# Altium PCB S7CAS-PLEIADES-CARTE-MERE_P01.PcbDoc (part 8 of 9)
Units mil, origin at the board's own origin, x right, y up, seen from the top; angles counter-clockwise.
Board outline 6153 x 3696 mil, 16 copper layers (Top, Ground Plane 1, Signal Layer 1, Ground Plane 2, Signal Layer 2, Ground Plane 3, Power Plane, Ground Plane 4, Ground Plane 5, Power Plane 2, Ground Plane 6, Signal Layer 3, Ground Plane 7, Signal Layer 4, Ground Plane 8, Bottom), stack 75.282 mil thick; 430 components, 328 nets, 2174 pads, 2158 vias.
Unrouted connection lines stored in the file: 202.
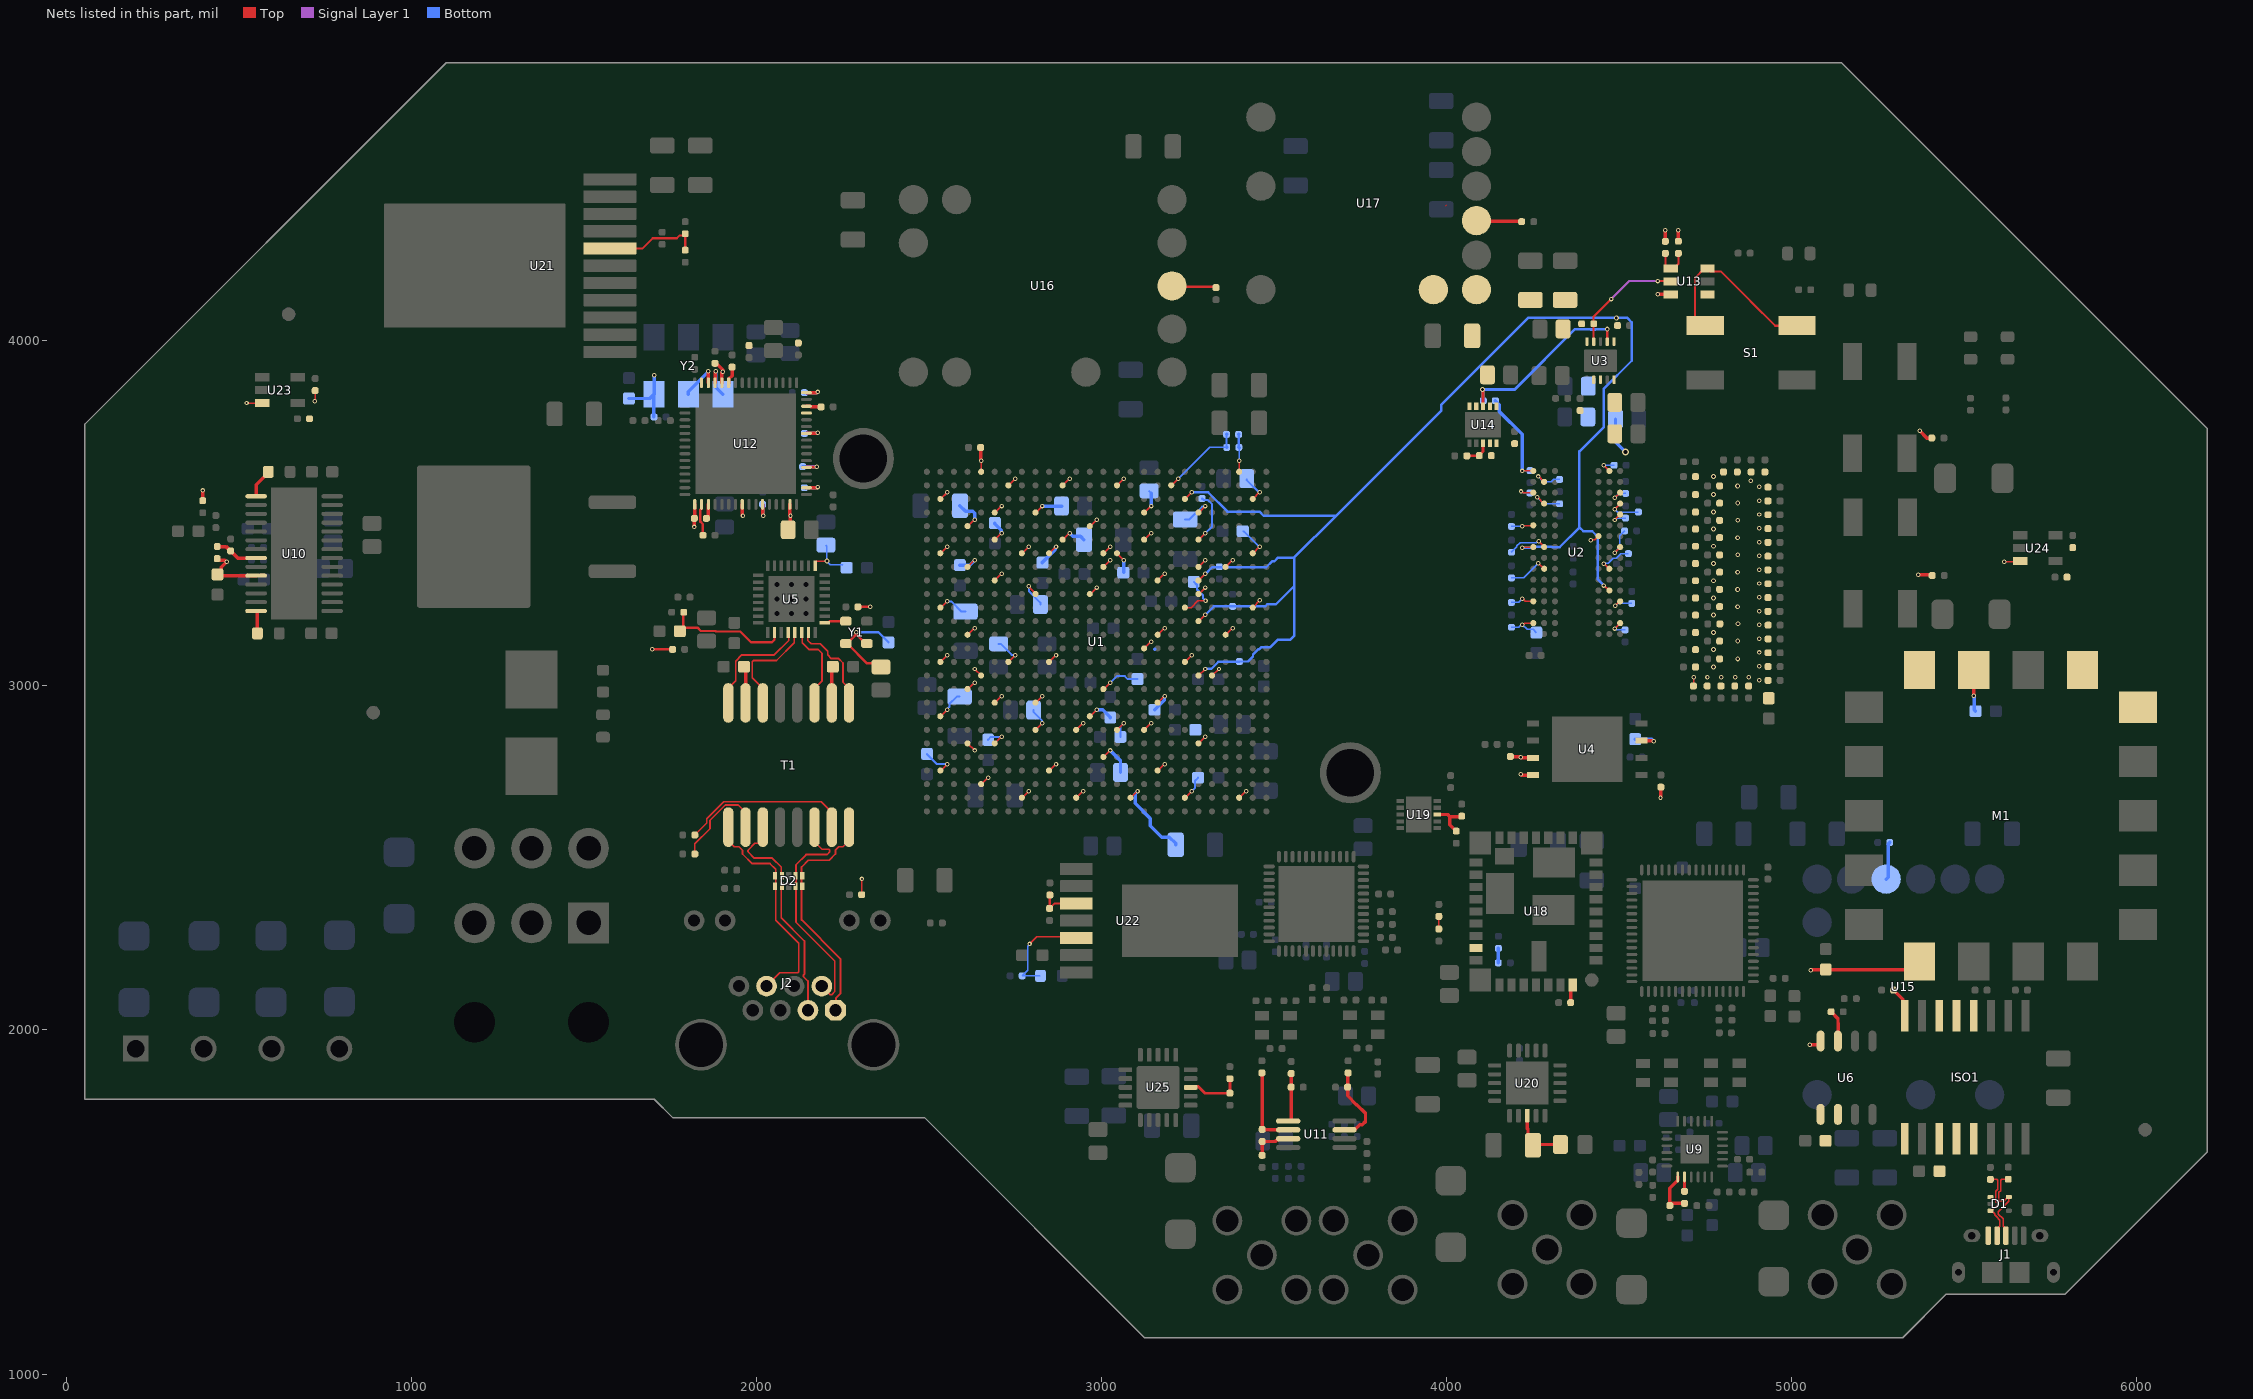
[diagram p20: the nets of this part, all layers, seen from the top]

## Via types
v1: diameter 14, hole 8, Top to Bottom, 1322 vias
v2: diameter 13, hole 7, Top to Bottom, 662 vias
v3: diameter 19.68, hole 7.87, Top to Bottom, 137 vias
v4: diameter 19.68, hole 11.81, Top to Bottom, 15 vias
v5: diameter 15.75, hole 7.87, Top to Bottom, 12 vias
v6: diameter 22, hole 12, Top to Bottom, 9 vias
v7: diameter 20, hole 12, Top to Bottom, 1 vias

## Nets (pads, with @x,y where several pads share a name; then routed paths per layer and width w, separated by ;. In a path a pad name is that pad's centre, name@x,y a point inside that pad or via, vN(x,y) a via of type N, cw(c..) or ccw(c..) an arc to the next point about the centre after c; other vN are vias at no path point) (continued)
NetR72_1: R72.1 R91.2 | length 36.5
  Top w5.16: R72.1@3978.31,2292.75 R91.2@3978.31,2329.25
NetR76_1: R76.1 R79.2 U11.3 | length 234.8
  Top w10: U11.3@3704.98,1710.55 3734.09,1710.55 3749.33,1725.79 3756.93,1725.79 3765.79,1734.65 3765.79,1758.52 3740.43,1783.89 3739.18,1783.89 3713.81,1809.25 R79.2@3713.81,1834.25 3714.56,1835 3714.56,1875 R76.1@3715.31,1875.75
NetR80_1: R80.1 R82.2 U11.7 | length 118.7
  Top w10: R82.2@3466.31,1636.75 R80.1@3466.31,1676.75 3504.27,1676.75 3512.48,1684.96 U11.7@3541.59,1684.96
NetR80_2: R80.2 R81.1 U11.6 | length 240.1
  Top w10: R81.1@3465.51,1875.75 3465.91,1875.35 3465.91,1712.15 R80.2@3466.31,1711.75 3466.92,1711.15 3540.99,1711.15 U11.6@3541.59,1710.55
NetR83_1: R83.1 R86.2 U11.5 | length 144.8
  Top w10: U11.5@3541.59,1736.14 3547.66,1736.14 3550.32,1738.79 R86.2@3550.32,1834.25 R83.1@3550.31,1873.75
NetR89_2: R89.2 R90.2 U9.1 | length 137.2
  Top w10: U9.1@4670.91,1574.07 4670.91,1564.39 4648.13,1541.6 R89.2@4648.13,1491.28 4648.67,1491.28 4654.67,1497.28 R90.2@4690.6,1497.28
NetR90_1: R90.1 U9.2 | length 41.8
  Top w10: R90.1@4690.6,1532.28 U9.2@4690.6,1574.07
NetR92_1: R92.1 R93.2 U10.8 | length 126.6
  Top w10: R92.1@437,3401.5 462.46,3401.5 475.46,3388.5 R93.2@476,3388.5 496.3,3368.2 U10.8@549.76,3368.2
NetR94_2: R94.2 U10.1 | length 85.3
  Top w10: U10.1@549.76,3547.34 549.76,3580.57 585.19,3616 R94.2@585.19,3618
NetR97_2: R97.2 U10.14 | length 68.1
  Top w10: U10.14@549.76,3214.66 552.86,3214.66 553.69,3213.82 R97.2@553.69,3150
NetR104_1: R104.1 R112.1 U13.4 | length 112.9
  Top w6: R112.1@4634.98,4251.22 4634.98,4216.21 4643.79,4207.4 U13.4@4650.85,4207.4 4659.71,4207.4 4672.73,4220.42 R104.1@4672.73,4251.5
NetR108_1: R108.1 U12.3 | length 43
  Top w10: R108.1@1855.15,3483.19 1855.15,3483.73 1860.74,3489.33 U12.3@1860.74,3523.83
NetR109_2: R109.2 U12.30 | length 43.3
  Top w10: U12.30@2145.19,3808.28 2155.47,3808.28 2157.56,3806.19 R109.2@2187.65,3806.19
NetR110_2: R110.2 U12.2 | length 94.2
  Top w7: U12.2@1841.06,3523.83 1841.06,3512.05 1837.65,3508.64 1837.65,3473.6 1845.15,3466.1 R110.2@1845.15,3434.19
NetR111_2: R111.2 U12.43 | length 49.6
  Top w10: U12.43@1919.8,3876.19 1920.27,3876.66 1920.27,3887.33 1929.65,3896.71 R111.2@1929.65,3921.69
NetR113_2: R113.2 U17.7 | length 134
  Top w4: 3998.46,4391.22 3999.71,4389.97 ; U17.7@4087.46,4346.22 U17.7@4088.96,4344.72 ; R113.2@4216.98,4344.72 R113.2@4218.48,4343.22
  Top w10: U17.7@4088.96,4344.72 R113.2@4216.98,4344.72
NetR114_1: R114.1 R115.2 U14.8 | length 76.1
  Top w8: R115.2@4059.48,3664.22 4059.98,3664.72 4094.98,3664.72 R114.1@4095.48,3665.22 4095.48,3666.3 4106.61,3677.43 U14.8@4106.61,3700.28
NetR116_2: R116.2 U15.7 | length 110.7
  Bottom w10: U15.7@5275.13,2437.28 5281.24,2443.4 5281.24,2539.26 R116.2@5285.63,2543.65
NetR117_1: R117.1 R118.2 U19.8 | length 123.5
  Top w10: U19.8@3974.13,2624.64 4004.49,2624.64 4010.35,2618.78 ; R118.2@4028.86,2576.41 4010.35,2594.91 4010.35,2618.78 ; R117.1@4044.73,2619.91 4043.61,2618.78 4010.35,2618.78
NetR119_2: R119.2 U16.8 | length 122.5
  Top w8: U16.8@3207.53,4154.61 R119.2@3330.03,4154.61
NetR120_1: R120.1 R121.2 U18.27 | length 42.2
  Bottom w5.16: R121.2@4150.63,2194.78 R121.2@4150.88,2195.03 ; R120.1@4150.88,2236.53 R120.1@4151.13,2236.78
  Bottom w10: R121.2@4150.88,2195.03 R120.1@4150.88,2236.53
NetR122_2: R122.2 U18.36 | length 53.3
  Top w4: U18.36@4360.63,2124.4 U18.36@4366.43,2130.2
  Top w10: R122.2@4360.63,2079.28 U18.36@4360.63,2124.4
NetR123_2: R123.2 R124.1 U21.7 | length 283.6
  Top w6: U21.7@1575.28,4265.74 1670.09,4265.74 1699.57,4295.22 1769.38,4295.22 1777.79,4303.64 1789.21,4303.64 R124.1@1793.79,4308.22 R123.2@1793.79,4260.72
NetR125_1: R125.1 R126.2 U20.3 | length 173.3
  Top w10: U20.3@4234.78,1751.52 4234.78,1714.25 4236.88,1712.15 4236.88,1680.03 R125.1@4251.13,1665.78 4253.42,1668.07 R126.2@4330.93,1668.07
NetR127_1: R127.1 R128.2 U22.5 | length 306.7
  Top w4: v2(2791.89,2249.41) 2812.42,2269.94 2930.93,2269.94 U22.5@2935.61,2265.25
  Bottom w4: R128.2@2770.51,2156.94 2821.01,2156.94 R127.1@2822.01,2155.94 ; R128.2@2771.01,2157.44 2787.38,2173.81 2787.38,2242.57 2791.89,2247.08 v2(2791.89,2249.41)
NetR133_1: R133.1 R134.2 U25.3 | length 163.9
  Top w8: U25.3@3258.87,1836.84 3279.94,1836.84 3299.94,1816.84 R133.1@3372.65,1816.84 R134.2@3372.65,1858.71
NetR135_1: R135.1 R136.2 U22.3 | length 123.7
  Top w6: R136.2@2850.01,2352.44 2864.51,2366.94 U22.3@2927.61,2366.94 ; R136.2@2850.51,2352.94 R135.1@2850.51,2390.94 ; R135.1@2850.51,2397.94 2850.01,2397.44 R135.1@2850.96,2398.39
NetS1_3: S1.3 S1.4 U13.3 | length 530.5
  Top w6: S1.4@4750.77,4041.6 4745.01,4041.6 4720.45,4066.16 4720.45,4179.56 4748.29,4207.4 U13.3@4757.15,4207.4 4765.96,4198.59 4796.98,4198.59 4881.73,4113.84 4881.73,4113.26 4953.39,4041.6 S1.3@5016.52,4041.6
NetU12_45: U12.45 Y2.4 | length 108.8
  Top w10: U12.45@1880.43,3876.19 1880.9,3876.66 1880.9,3906.84 1882.4,3908.33 v2(1882.4,3909.14)
  Bottom w10: v2(1882.4,3909.14) 1882.4,3862.77 Y2.4@1902.65,3842.51
NetU12_46: U12.46 Y2.5 | length 123.7
  Top w10: v2(1860.65,3909.19) 1860.7,3909.14 U12.46@1860.74,3876.19 U12.46@1860.74,3876.19
  Bottom w10: Y2.5@1802.65,3842.51 1802.65,3850.39 1860.65,3908.39 v2(1860.65,3909.19)
OSC_25MHZ: U5.9 Y1.3 | length 63.3
  Top w7.5: U5.9@2198.22,3180.28 2209.05,3180.28 2213.97,3185.2 Y1.3@2259.47,3185.2
PG_1V5: R53.1 U3.7 U14.3 | length 551.4
  Top w8: U14.3@4106.61,3808.54 v1@4106.61,3855.34 ; U3.7@4466.66,3995.34 v1(4466.66,4031.72)
  Bottom w8: R53.1@4107.48,3824.22 4106.35,3825.34 4106.35,3855.6 v1(4105.23,3856.72) 4198.45,3856.72 4373.45,4031.72 4416.91,4031.72 4417.91,4030.72 4431.58,4030.72 4432.58,4031.72 v1(4466.66,4031.72)
PG_DDR3: R30.1 U3.9 U13.5 | length 339.7
  Top w6: U3.9@4427.29,3995.34 4427.29,4068.29 v2(4478,4119) ; v2(4613,4171.22) 4649.63,4171.22 U13.5@4650.85,4170
  Signal Layer 1 w6: v2(4478,4119) 4530.22,4171.22 v2(4613,4171.22)
PROGRAM_B: M1.9 R37.1 R58.1 U1.AF3 U13.1 | length 107.9
  Top w4: U1.AF3@3399.9,3619.38 v2@3399.9,3649.42
  Bottom w4: R58.1@3399.41,3687.99 3399.41,3650.5 v2(3400.2,3649.72)
  Bottom w6: R58.1@3398.32,3689.09 R37.1@3398.32,3726.38
  Bottom w10: R37.1@3398.01,3726.68 R37.1@3398.32,3726.38 ; R58.1@3398.32,3689.09 R58.1@3399.41,3687.99
RDCT_ISO: C70.2 T1.7 | length 106.9
  Top w5.16: C70.2@1964.07,3053.18 C70.2@1968.57,3048.68
  Top w10: T1.7@1968.57,2948.18 C70.2@1968.57,3048.68
RX_ETH_N: D2.1 D2.10 J2.6 T1.9 | length 656.1
  Top w5.16: T1.9@1918.57,2588.18 1918.57,2548.48 1936.06,2531 1949.75,2531 1959.68,2521.07 1959.68,2510.1 1987.49,2482.29 2039.58,2482.29 2055.96,2465.91 2055.96,2449.09 D2.10@2054.2,2447.33 2055.96,2445.57 2055.96,2418.78 D2.1@2054.2,2417.02 2055.96,2415.26 2055.96,2318.32 2122.96,2251.32 2122.96,2168.78 2119.93,2165.76 2068.15,2165.76 J2.6@2029.57,2127.18
RX_ETH_P: D2.2 D2.9 J2.3 T1.11 | length 663
  Top w5.16: T1.11@2018.57,2588.18 2018.57,2552.53 2007.1,2541.05 1995.83,2541.05 1975.84,2521.07 1975.84,2516.79 1994.18,2498.45 2046.28,2498.45 2072.13,2472.6 2072.13,2449.09 D2.9@2073.89,2447.33 2072.13,2445.57 2072.13,2418.78 D2.2@2073.89,2417.02 2072.13,2415.26 2072.13,2325.01 2139.12,2258.02 2139.12,2162.09 2136.31,2159.28 2136.31,2155 2149.57,2141.74 J2.3@2149.57,2057.18
RX_ISO_N: T1.8 U5.4 | length 332.8
  Top w5.16: T1.8@1918.57,2948.18 1918.57,2990.68 1939.99,3012.09 1939.99,3069.42 1957.8,3087.23 2051.69,3087.23 2093.68,3129.23 2093.68,3150.96 U5.4@2091.92,3152.72
RX_ISO_P: T1.6 U5.5 | length 307.6
  Top w5.16: T1.6@2018.57,2948.18 2018.57,2990.68 1988.15,3021.09 1988.15,3068.04 1991.18,3071.06 2058.38,3071.06 2109.85,3122.53 2109.85,3150.96 U5.5@2111.61,3152.72
RXCT_ETH: R50.2 T1.10 | length 288.9
  Top w5.16: R50.2@1821.57,2510.18 1821.57,2539.38 1865.6,2583.41 1865.6,2608.23 1909.63,2652.26 1946.99,2652.26 1968.57,2630.68 T1.10@1968.57,2588.18
RXD_JTAG: M1.5 U1.Y13 | length 26.6
  Top w4: U1.Y13@3006.63,3382 v2@3025.45,3400.82
  other v2: 3026.18,3400.82
TDCT_ISO: C69.2 T1.2 | length 106.2
  Top w5.16: C69.2@2218.57,3050.16 C69.2@2221.58,3053.18
  Top w10: T1.2@2218.57,2948.18 C69.2@2218.57,3050.16
TX_ETH_N: D2.4 D2.7 J2.2 T1.14 | length 684.2
  Top w5.16: T1.14@2168.57,2588.18 2168.57,2545.68 2190.15,2524.09 2209.87,2524.09 2212.89,2521.07 2212.89,2516.79 2204.65,2508.55 2144.25,2508.55 2115.02,2479.32 2115.02,2449.09 D2.7@2113.26,2447.33 2115.02,2445.57 2115.02,2418.78 D2.4@2113.26,2417.02 2115.02,2415.26 2115.02,2312.35 2227.32,2200.05 2227.32,2111.54 2218.05,2102.27 2213.77,2102.27 2189.57,2126.47 J2.2@2189.57,2127.18
TX_ETH_P: D2.5 D2.6 J2.1 T1.16 | length 685.6
  Top w5.16: J2.1@2229.57,2057.18 2230.53,2058.14 2230.53,2091.9 2243.48,2104.85 2243.48,2206.74 2131.18,2319.04 2131.18,2415.26 D2.5@2132.94,2417.02 2131.18,2418.78 2131.18,2445.57 D2.6@2132.94,2447.33 2131.18,2449.09 2131.18,2472.62 2150.94,2492.38 2211.34,2492.38 2229.06,2510.1 2229.06,2521.07 2238.98,2531 2251.08,2531 2268.57,2548.48 T1.16@2268.57,2588.18
TX_ISO_N: T1.3 U5.6 | length 253.7
  Top w5.16: U5.6@2131.29,3152.72 2133.05,3150.96 2133.05,3122.53 2152.32,3103.26 2178.78,3103.26 2190.54,3091.51 2190.54,3012.64 2168.57,2990.68 T1.3@2168.57,2948.18
TX_ISO_P: T1.1 U5.7 | length 282.6
  Top w5.16: U5.7@2150.98,3152.72 2149.22,3150.96 2149.22,3129.23 2159.02,3119.43 2185.47,3119.43 2206.7,3098.2 2206.7,3087.23 2217.17,3076.76 2238.32,3076.76 2251.07,3064.01 2251.07,3008.18 2268.57,2990.68 T1.1@2268.57,2948.18
TXCT_ETH: R49.2 T1.15 | length 499.1
  Top w5.16: R49.2@1821.57,2565.18 1856.44,2600.04 1856.44,2612.02 1905.84,2661.42 2187.83,2661.42 2218.57,2630.68 T1.15@2218.57,2588.18
TXD_JTAG: M1.6 U1.W13 | length 26.6
  Top w4: U1.W13@3006.63,3342.63 v2@3025.45,3361.45
  other v2: 3026.18,3361.45
UD_N: D1.3 J1.2 R44.2 | length 214.3
  Top w4: R44.2@5577.13,1566.78 5577.38,1567.03 5596.28,1567.03 5598.63,1564.69 5598.63,1538.35 5593.15,1532.88 5593.15,1502.02 5598.13,1497.04 5598.13,1493.72 5580.5,1476.09 D1.3@5577.55,1476.09 5579.99,1476.09 5589.48,1466.6 5589.48,1464.17 5594.17,1459.47 5605.01,1448.63 5605.01,1430.7 5596.72,1422.4 J1.2@5596.72,1403.78
UD_P: D1.5 J1.3 R42.2 | length 251.5
  Top w4: J1.3@5622.31,1403.78 5622.31,1422.4 5614.01,1430.7 5614.01,1452.36 5600.54,1465.84 5600.54,1473.39 5630.7,1503.56 D1.5@5630.7,1515.46 5627.75,1515.46 5615.69,1503.4 5604.5,1503.4 5602.15,1505.75 5602.15,1529.15 5607.63,1534.62 5607.63,1564.69 5610.22,1567.28 R42.2@5629.13,1567.28
VBUS_JTAG: R40.2 U6.7 | length 92.9
  Top w4: U6.7@5135.13,1968.08 U6.7@5135.63,1968.58
  Top w10: R40.2@5115.63,2052.78 5135.55,2032.85 5135.55,2020.35 5136.13,2019.78 ; U6.7@5135.63,1968.58 5135.63,2019.28
VBUS_USB: C119.2 C120.2 D1.1 ISO1.1 ISO1.3 ISO1.4 ISO1.5 J1.1 U6.1 U6.2
VCC1V5: C27.2 C28.2 C57.2 C58.2 C60.2 C74.2 C75.2 C89.2 C126.2 C127.2 C128.2 C129.2 C152.2 C153.2 C154.2 C155.2 C158.2 C159.2 C160.2 C161.2 C162.2 C163.2 C164.2 C167.2 C170.2 R31.1 R53.2 R114.2 U1.AC6 U1.AD2 U1.M7 U1.P4 U1.P9 U1.T2 U1.T7 U1.W4 U1.W6 U1.Y2 U2.A1 U2.A8 U2.B2 U2.C1 U2.C9 U2.D2 U2.D9 U2.E9 U2.F1 U2.G7 U2.H2 U2.H9 U2.K2 U2.K8 U2.N1 U2.N9 U2.R1 U2.R9 U3.2 U14.9 U14.10 | length 2239.7
  Top w4: U1.P9@3164.11,3145.78 v2@3182.93,3164.6 ; U1.M7@3242.85,3067.04 v2@3261.67,3085.86 ; U1.T7@3242.85,3224.52 3260.48,3224.52 3280.05,3244.09 v2(3302.03,3244.09) ; U1.W6@3282.22,3342.63 v2@3301.04,3361.45 ; U1.AC6@3282.22,3500.11 v2@3301.04,3518.93 ; U1.P4@3360.96,3145.78 v2@3379.78,3164.6 ; U1.W4@3360.96,3342.63 v2@3379.78,3361.45 ; U1.T2@3439.7,3224.52 3439.7,3225.64 3459.25,3245.19 v2(3459.25,3245.59) ; U1.Y2@3439.7,3382 v2@3458.52,3400.82 ; U1.AD2@3439.7,3539.48 v2@3458.52,3558.3 ; v2(4216.59,3561.08) 4219.02,3561.08 4222.51,3557.59 U2.C1@4252.2,3557.59 ; v2(4220.04,3249.84) 4222.47,3249.84 4229.03,3243.29 4251.55,3243.29 U2.N1@4252.2,3242.63 ; v2(4220.08,3175.3) 4222.51,3175.3 4226.85,3179.64 U2.R1@4252.2,3179.64 ; v2(4220.08,3460.47) 4221.39,3461.79 4250.89,3461.79 U2.F1@4252.2,3463.1 ; v2(4220.08,3620.58) U2.A1@4252.2,3620.58 ; v2(4264.28,3544.22) 4264.93,3544.22 4283.06,3526.09 U2.D2@4283.7,3526.09 ; v2(4266.95,3353.16) 4267.3,3353.16 4283.35,3337.12 U2.K2@4283.7,3337.12 ; v2(4267.08,3604.63) 4267.62,3604.63 4283.16,3589.09 U2.B2@4283.7,3589.09 ; v2(4267.99,3417.13) 4267.99,3416.47 4283.7,3400.77 U2.H2@4283.7,3400.11 ; v2(4418.98,3419.82) 4420.7,3421.54 4430.23,3421.54 4440.3,3431.61 U2.G7@4441.18,3431.61 ; v2(4456.04,3637.22) U2.A8@4472.68,3620.58 ; v2(4456.89,3351.59) 4457.55,3351.59 4472.02,3337.12 U2.K8@4472.68,3337.12 ; v2(4487.83,3384.05) 4487.97,3384.05 4504.03,3400.11 U2.H9@4504.17,3400.11 ; v2(4487.91,3163.87) 4488.16,3163.87 4503.92,3179.64 U2.R9@4504.17,3179.64 ; v2(4487.91,3542.42) 4488.46,3542.42 4503.63,3557.59 U2.C9@4504.17,3557.59 ; v2@4488.03,3478.46 U2.E9@4504.17,3494.6 ; v2@4488.03,3509.95 U2.D9@4504.17,3526.09 ; v2(4489.44,3229.39) 4490.18,3229.39 4503.43,3242.63 U2.N9@4504.17,3242.63
  Bottom w4: C128.2@3410.01,3445.65 C128.2@3412.47,3445.65 ; C127.2@3421.63,3594.21 C127.2@3421.63,3598.49 ; v2@3457.29,3400.82 v2(3459.25,3400.82) ; v2@3457.53,3558.3 v2(3459.25,3558.3) ; C158.2@4188.98,3167.65 4210.05,3167.65 4217.71,3175.3 v2(4220.08,3175.3) 4233.99,3161.39 4251.78,3161.39 C153.2@4261.33,3151.84 ; C159.2@4188.98,3239.37 4209.57,3239.37 v2(4220.04,3249.84) ; C160.2@4188.98,3310.56 4224.35,3310.56 v2(4266.95,3353.16) ; C161.2@4188.98,3384.94 4188.98,3385.25 4204.75,3401.02 4204.75,3403.59 4214.07,3412.91 4261.33,3412.91 4265.56,3417.13 v2(4267.99,3417.13) ; C167.2@4188.98,3459.76 4189.33,3460.12 4219.72,3460.12 v2(4220.08,3460.47) ; v2(4216.59,3561.08) 4219.02,3561.08 4223.04,3557.07 C164.2@4242.41,3557.07 ; v2(4220.08,3620.58) 4220.65,3621.15 4242.41,3621.15 C170.2@4242.98,3621.72 ; v2(4264.28,3544.22) 4282.74,3525.77 4328.04,3525.77 C162.2@4328.39,3525.42 ; v2(4267.08,3604.63) 4281.77,3589.94 4304.83,3589.94 4310.97,3596.08 C163.2@4328.39,3596.08 ; v2(4456.04,3637.22) C152.2@4486.5,3637.22 ; v2(4456.89,3351.59) 4458.32,3353.02 4469.39,3353.02 4483.96,3367.59 4492.59,3367.59 4505.91,3380.91 C74.2@4527.98,3380.91 ; v2(4487.83,3384.05) 4502.73,3398.95 4502.73,3432.79 C75.2@4516.89,3446.96 ; v2(4487.91,3163.87) 4490.35,3163.87 4494.23,3159.99 C155.2@4518.41,3159.99 ; v2(4487.91,3478.46) 4490.35,3478.46 4495.91,3484.02 C60.2@4519.98,3484.02 ; v2(4487.91,3509.95) 4488.72,3509.95 4497.16,3501.52 C58.2@4557.03,3501.52 ; v2(4487.91,3542.42) 4500.94,3555.44 C57.2@4519.98,3555.44 ; v2(4489.44,3229.39) 4491.87,3229.39 4499.16,3236.68 C154.2@4537.72,3236.68
  Bottom w6: C126.2@3243.13,3479.78 3255.13,3479.78 3292.55,3517.21 3300.05,3517.21 v2(3301.77,3518.93) ; C129.2@3268.13,3299.28 3277.47,3289.94 3277.47,3276.88 3294.6,3259.74 3294.6,3251.51 v2(3302.03,3244.09) ; C128.2@3412.47,3445.65 v2@3457.29,3400.82 ; C127.2@3421.63,3594.21 v2@3457.53,3558.3
  Bottom w10: R53.2@4142.48,3824.22 4153.79,3812.9 4153.79,3792.97 4220.08,3726.68 v2(4220.08,3620.58)
  other v2: 3262.4,3085.86 3183.66,3164.6 3380.51,3164.6 3301.77,3361.45 3380.51,3361.45
VDD_1V2: C73.2 C78.2 U5.2 | length 366.4
  Top w7: C78.2@1778.07,3156.18 C78.2@1788.2,3166.3 ; C73.2@1789.36,3211.14 1788.2,3209.98 C78.2@1788.2,3166.3 ; U5.2@2052.55,3152.72 2052.48,3152.64 2052.48,3131.28 2044.68,3123.48 1985.24,3123.48 1953.44,3155.28 1882.92,3155.28 1881.52,3156.68 1838.63,3156.68 1829,3166.3 C78.2@1788.2,3166.3
VDD_3V3: C1.2 C4.2 C5.2 C6.2 C25.2 C33.2 C34.2 C35.2 C37.2 C62.2 C63.2 C64.2 C65.2 C66.2 C67.2 C71.2 C85.2 C86.2 C117.2 C121.2 C122.2 C123.2 C124.2 C125.2 C141.2 C142.2 C143.2 C144.2 C145.2 C146.2 C147.2 C148.2 C149.2 C150.2 C151.2 C177.2 C178.2 C179.2 C180.2 C219.2 C220.2 C221.2 C222.2 C223.2 C224.2 C225.2 ISO1.12 ISO1.13 ISO1.14 ISO1.16 L1.2 L2.2 L3.2 M1.8 M1.15 R18.2 R30.2 R34.2 R36.2 R37.2 R38.2 R39.2 R47.2 R58.2 R92.2 R95.2 R104.2 R105.1 R106.1 R108.2 R112.2 R129.2 R130.2 R131.2 R132.2 U1.AA6 U1.AA10 U1.AA16 U1.AA21 U1.AB14 U1.AB23 U1.AC10 U1.AC18 U1.AC21 U1.AD25 U1.AE8 U1.AE12 U1.AE16 U1.AE20 U1.AF22 U1.B3 U1.B7 U1.B11 U1.B15 U1.B19 U1.C22 U1.D9 U1.D17 U1.D25 U1.E13 U1.F6 U1.F21 U1.F23 U1.G10 U1.G12 U1.G15 U1.G18 U1.H14 U1.H25 U1.J9 U1.J18 U1.J21 U1.K13 U1.K23 U1.L5 U1.L22 U1.M17 U1.M20 U1.M25 U1.N10 U1.P23 U1.T25 U1.U6 U1.U14 U1.U18 U1.V9 U1.V21 U1.W23 U1.Y12 U1.Y17 U1.Y19 U1.Y25 U3.10 U4.3 U4.7 U4.8 U5.17 U6.8 U10.10 U12.1 U12.8 U12.11 U12.15 U12.18 U12.21 U12.26 U12.29 U12.32 U12.44 U12.47 U13.6 U14.1 U14.2 U14.4 U14.5 U17.4 U17.5 U23.3 U24.3 Y1.1 Y1.4 Y2.6 | length 6052.4
  Top w4: v2(522,3817.6) U23.3@567.82,3817.6 ; v2(720,3823) 721,3824 R130.2@721,3853.5 ; U5.17@2170.66,3345.63 2170.66,3356.46 2173.58,3359.38 v1(2204.65,3359.38) ; R47.2@2305.07,2392.18 2305.6,2392.7 2305.6,2437.25 v2(2306.13,2437.78) ; U1.D25@2534.19,2752.08 v2@2553.01,2770.9 ; U1.H25@2534.19,2909.56 v2@2553.01,2928.38 ; U1.M25@2534.19,3067.04 v2@2553.01,3085.86 ; U1.T25@2534.19,3224.52 v2@2553.01,3243.34 ; U1.Y25@2534.19,3382 v2@2553.01,3400.82 ; U1.F23@2612.93,2830.82 2612.93,2829.95 2632.48,2810.41 v2(2632.48,2810.27) ; U1.K23@2612.93,2988.3 v2@2631.75,3007.12 ; U1.P23@2612.93,3145.78 v2@2631.75,3164.6 ; U1.W23@2612.93,3342.63 v2@2631.75,3361.45 ; U1.AB23@2612.93,3460.74 v2@2631.75,3479.56 ; v2(2632.48,3046.49) 2632.62,3046.49 2651.44,3027.67 U1.L22@2651.57,3027.67 U1.L22@2652.3,3027.67 ; U1.AF22@2651.87,3619.38 v2@2651.87,3649.42 ; U1.C22@2652.3,2712.71 v2@2671.12,2731.53 ; U1.F21@2691.67,2830.82 v2@2710.49,2849.64 ; U1.J21@2691.67,2948.93 v2@2710.49,2967.75 ; U1.V21@2691.67,3303.26 v2@2710.49,3322.08 ; U1.AA21@2691.67,3421.37 v2@2710.49,3440.19 ; U1.AC21@2691.67,3500.11 v2@2710.49,3518.93 ; U1.M20@2731.04,3067.04 v2@2749.86,3085.86 ; U1.AE20@2731.04,3578.85 v2@2749.86,3597.67 ; U1.B19@2770.41,2673.34 v2@2789.23,2692.16 ; U1.Y19@2770.41,3382 v2@2789.23,3400.82 ; v2(2789.96,3286.6) 2789.96,3284.79 2809.78,3264.97 U1.U18@2809.78,3263.89 ; U1.G18@2809.78,2870.19 v2@2828.6,2889.01 ; U1.J18@2809.78,2948.93 v2@2828.6,2967.75 ; U1.AC18@2809.78,3500.11 v2@2828.6,3518.93 ; U1.D17@2849.15,2752.08 v2@2867.97,2770.9 ; U1.M17@2849.15,3067.04 v2@2867.97,3085.86 ; U1.Y17@2849.15,3382 v2@2867.97,3400.82 ; U1.AA16@2888.52,3421.37 v2@2907.34,3440.19 ; U1.AE16@2888.52,3578.85 v2@2907.34,3597.67 ; U1.B15@2927.89,2673.34 v2@2946.71,2692.16 ; U1.G15@2927.89,2870.19 v2@2946.71,2889.01 ; U1.H14@2967.26,2909.56 v2@2986.08,2928.38 ; U1.U14@2967.26,3263.89 v2@2986.08,3282.71 ; U1.AB14@2967.26,3460.74 v2@2986.08,3479.56 ; U1.E13@3006.63,2791.45 v2@3025.45,2810.27 ; U1.K13@3006.63,2988.3 v2@3025.45,3007.12 ; U1.G12@3046,2870.19 v2@3064.82,2889.01 ; U1.Y12@3046,3382 3046,3380.77 3064.82,3361.95 v2(3064.82,3361.45) ; U1.AE12@3046,3578.85 v2@3064.82,3597.67 ; U1.B11@3085.37,2673.34 v2@3104.19,2692.16 ; U1.G10@3124.74,2870.19 v2@3143.56,2889.01 ; U1.N10@3124.74,3106.41 v2@3143.56,3125.23 ; U1.AA10@3124.74,3421.37 v2@3143.56,3440.19 ; U1.AC10@3124.74,3500.11 v2@3143.56,3518.93 ; U1.D9@3164.11,2752.08 v2@3182.93,2770.9 ; U1.J9@3164.11,2948.93 v2@3182.93,2967.75 ; U1.V9@3164.11,3303.26 v2@3182.93,3322.08 ; U1.AE8@3203.48,3578.85 v2@3222.3,3597.67 ; U1.B7@3242.85,2673.34 v2@3261.67,2692.16 ; U1.F6@3282.22,2830.82 v2@3301.04,2849.64 ; U1.U6@3282.22,3263.89 v2@3301.04,3282.71 ; U1.AA6@3282.22,3421.37 v2@3301.04,3440.19 ; U1.L5@3321.59,3027.67 v2@3340.41,3046.49 ; U1.B3@3400.33,2673.34 v2@3419.15,2692.16 ; v2(5618,3357.6) U24.3@5663.82,3357.6
  Top w6: U1.AD25@2533.26,3539.48 U1.AD25@2533.46,3539.48 2534.92,3539.48 v2(2553.74,3558.3)
  Top w7: v2(1697.57,3103.26) L1.2@1757.07,3103.26 ; Y1.4@2259.47,3120.24 Y1.4@2263.41,3120.24 ; R18.2@2294.27,3226.68 v2(2330.6,3226.68) ; Y1.1@2320.64,3120.38 Y1.1@2320.49,3120.24 2316.56,3120.24 2291.29,3145.5 2291.29,3151.45 v2(2289.57,3153.18) 2287.85,3151.45 2287.85,3144.68 Y1.4@2263.41,3120.24 ; C220.2@2359.07,3045.18 2341.53,3062.72 2320.93,3062.72 Y1.4@2263.41,3120.24
  Top w10: R95.2@395,3534.5 v2(395,3564) ; R92.2@437,3366.5 441.38,3362.12 459.33,3362.12 464.45,3357 v2(465.26,3357) 449.23,3340.96 449.23,3324.53 C1.2@441.59,3316.89 ; C1.2@441.72,3317.02 U10.10@549.76,3317.02 ; v2(1819.65,3458.19) 1819.9,3458.44 1819.9,3482.94 R108.2@1820.15,3483.19 1820.9,3483.94 1820.9,3523.36 U12.1@1821.37,3523.83 ; C221.2@1880.15,3932.69 1884.53,3928.31 1887.98,3928.31 1902.08,3914.21 1902.08,3908.96 v2(1902.65,3908.39) 1902.65,3907.58 1900.11,3905.04 U12.44@1900.11,3876.19 ; v2@1959.17,3493.61 U12.8@1959.17,3523.83 ; v2@2018.23,3493.61 U12.11@2018.23,3523.83 ; C180.2@2092.15,3450.19 2098.36,3456.4 2098.36,3490.26 v2(2098.93,3490.83) ; v2@2096.97,3493.61 U12.15@2096.97,3523.83 ; U12.18@2145.19,3572.06 v2@2175.41,3572.06 ; U12.21@2145.19,3631.11 v2(2174.67,3632.39) ; U12.26@2145.19,3729.54 v2@2175.41,3729.54 ; U12.32@2145.19,3847.65 v2@2175.41,3847.65 ; R38.2@2649.98,3688.74 2649.98,3652.71 2652.17,3650.53 v2(2652.17,3649.72) ; R34.2@4185.63,2792.77 4212.7,2792.77 4214.46,2791.02 v2(4215.27,2791.02) ; v2@4218.09,2739.01 U4.8@4251.55,2739.01 ; v2@4218.09,2789.01 U4.7@4251.55,2789.01 ; U4.3@4565.72,2839.01 4599.18,2839.01 4601.19,2837 v2(4602,2837) ; v2(4613,4132.6) U13.6@4650.85,4132.6 ; v2(4621,2673) 4621,2673.81 4622.06,2674.88 R39.2@4622.06,2704.01 ; R112.2@4634.98,4286.22 v2(4634.98,4318) ; R104.2@4672.73,4286.5 v2(4672.73,4318.28) ; v2(5053.88,1956.74) 5078.83,1956.74 5085.13,1963.03 U6.8@5085.13,1968.08 ; v2(5056.65,2173.12) 5057.46,2173.12 5059.61,2175.28 C66.2@5100.13,2175.28 5348.65,2175.28 M1.15@5371.91,2198.54 ; C37.2@5296.93,2115.78 5323.12,2089.58 5323.12,2047.03 ISO1.16@5329.13,2041.03 ; v2(5368.74,3319.73) 5368.84,3319.64 5409.4,3319.64 R105.1@5409.5,3319.54 ; v2(5372,3737) 5392.95,3716.05 R106.1@5407.5,3716 ; v2(5529.39,2968.81) M1.8@5529.39,3043.02 M1.8@5540.63,3054.26
  Bottom w4: C86.2@2201.57,3405.68 2204.65,3402.6 v1(2204.65,3359.38) 2214.87,3349.16 2249.19,3349.16 C71.2@2251.08,3347.27 ; C124.2@3063.63,3325.33 C124.2@3064.82,3326.53 ; C122.2@3138.13,3562.8 C122.2@3144.29,3556.64 ; v2(3223.03,3597.67) 3314.14,3688.78 R58.2@3363.63,3688.78
  Bottom w6: C150.2@2494.69,2800.4 2494.69,2799.9 2523.69,2770.9 v2(2553.74,2770.9) ; v2(2553.74,2928.38) 2553.74,2930.81 2559.99,2937.06 2559.99,2945.52 2581.03,2966.56 C142.2@2588.94,2966.56 ; v2(2553.74,3243.34) 2555.46,3241.62 2565.83,3241.62 2594.27,3213.18 C141.2@2606.27,3213.18 ; C148.2@2671.85,2841.49 2680,2849.64 v2(2711.22,2849.64) ; C144.2@2702.13,3119.36 2708.13,3119.36 2739.9,3087.58 2748.87,3087.58 v2(2750.59,3085.86) ; v2(2789.96,3286.6) 2789.96,3272.49 2823.46,3238.99 C145.2@2823.46,3232.99 ; C143.2@2803.78,2927.23 2803.78,2921.23 2827.61,2897.4 2827.61,2890.73 v2(2829.33,2889.01) ; v2(3026.18,3007.12) 3044.94,3025.88 3067.95,3025.88 3076.83,3016.99 C151.2@3104.92,3016.99 ; C147.2@3055.11,2849.64 3055.11,2878.56 v2(3065.55,2889.01) ; v2(3262.4,2692.16) 3262.4,2692.79 3270.93,2701.31 3270.93,2721.98 C149.2@3280.48,2731.53 ; R36.2@3291.98,3540.8 3296.35,3536.43 3309.02,3536.43 3321.02,3524.43 3321.02,3459.44 v2(3301.77,3440.19) ; R58.2@3363.32,3689.09 R37.2@3363.32,3726.38
  Bottom w7: v2(2289.57,3153.18) 2354.13,3153.18 2383.13,3124.18 C219.2@2383.13,3123.68
  Bottom w10: C178.2@1630.65,3830.69 1690.83,3830.69 Y2.6@1702.65,3842.51 ; C177.2@1703.15,3777.19 1703.15,3842.01 Y2.6@1702.65,3842.51 ; v2(1703.63,3898.19) 1703.63,3843.49 Y2.6@1702.65,3842.51 ; C222.2@2018.23,3523.83 2018.23,3493.61 2020.19,3491.64 v2(2020.19,3490.83) ; C225.2@2134.15,3633.08 2134.5,3632.74 2174.33,3632.74 v2(2174.67,3632.39) ; C179.2@2139.15,3572.06 2175.41,3572.06 2177.38,3574.03 v2(2178.19,3574.03) ; C224.2@2139.15,3729.54 2175.41,3729.54 2177.38,3731.51 v2(2178.19,3731.51) ; C223.2@2139.15,3847.65 2175.41,3847.65 2177.38,3849.62 v2(2178.19,3849.62) ; C65.2@2590.13,3347.57 2618.61,3347.57 v2(2632.48,3361.45) ; C62.2@2590.13,3519.78 2606.27,3503.64 2626.62,3503.64 2632.48,3497.78 v2(2632.48,3479.56) ; C64.2@2691.54,3469.69 2691.54,3467.05 2709.5,3449.09 2709.5,3441.91 v2(2711.22,3440.19) ; C123.2@2829.33,3354.83 2829.33,3355.33 2866.98,3392.98 2866.98,3399.1 v2(2868.7,3400.82) ; v2(2829.33,3518.93) C63.2@2884.63,3518.93 ; v2(2908.07,3440.19) 2916.91,3431.35 2939.52,3431.35 C121.2@2949.5,3421.37 ; v2(2986.81,2928.38) 3004.08,2928.38 3026.18,2906.28 C34.2@3026.18,2905.78 ; v2(3026.18,2810.27) 3055.63,2780.82 C33.2@3055.63,2746.78 ; C124.2@3064.82,3326.53 v2(3064.82,3361.45) ; v2(3104.92,2692.16) 3098.13,2685.36 3098.13,2656.77 3141.81,2613.09 3141.81,2592.29 3174.81,2559.29 3197.35,2559.29 3215.63,2541.02 C25.2@3215.63,2536.78 ; v2(3144.29,3518.93) C122.2@3144.29,3556.64 ; 3154.16,3103.69 3154.66,3103.69 ; C35.2@3154.66,2928.38 3181.94,2955.66 3181.94,2966.03 v2(3183.66,2967.75) ; R37.2@3363.01,3726.68 R37.2@3363.32,3726.38 ; R58.2@3363.32,3689.09 R58.2@3363.63,3688.78 ; C125.2@4547.52,2843 4595.19,2843 4601.19,2837 v2(4602,2837) ; v2(5529.39,2968.81) 5529.96,2968.24 5529.96,2928.39 C67.2@5534.13,2924.22
  other v2: 2789.96,2692.16 2947.44,2692.16 3419.88,2692.16 2671.85,2731.53 4215.27,2741.02 2868.7,2770.9 3183.66,2770.9 3301.77,2849.64 2947.44,2889.01 3144.29,2889.01 2711.22,2967.75 2829.33,2967.75 2632.48,3007.12 3341.14,3046.49 2553.74,3085.86 2868.7,3085.86 3144.29,3125.23 2632.48,3164.6 2986.81,3282.71 3301.77,3282.71 2711.22,3322.08 3183.66,3322.08 2553.74,3400.82 2789.96,3400.82 3144.29,3440.19 2986.81,3479.56 1961.14,3490.83 2711.22,3518.93 2750.59,3597.67 2908.07,3597.67 3065.55,3597.67
VREF0V75: C11.2 C12.2 C13.2 C50.2 U1.AD7 U1.L6 U1.R6 U1.V6 U2.H1 U2.M8 U3.6 | length 4045.2
  Top w4: U1.AD7@3242.85,3539.48 v2@3261.67,3558.3 ; U1.L6@3282.22,3027.67 v2@3301.04,3046.49 ; U1.R6@3282.22,3185.15 v2@3301.04,3203.97 ; U1.V6@3282.22,3303.26 v2@3301.04,3322.08 ; v2(4220.08,3398.41) 4221.13,3399.45 4251.55,3399.45 U2.H1@4252.2,3400.11 ; v2(4456.99,3288.49) 4457.65,3288.49 4472.01,3274.13 U2.M8@4472.68,3274.13
  Bottom w7: v2(3262.4,3558.3) 3309.98,3558.3 3365.35,3502.93 3458.51,3502.93 3471.02,3490.42 3680.17,3490.42 ; v2(3301.77,3046.49) 3302.03,3046.75 3318.77,3046.75 3339.07,3067.04 C13.2@3400.2,3067.04 ; v2(3301.77,3203.97) 3325.89,3228.09 C12.2@3380.51,3228.09 3475.15,3228.09 3481.09,3234.02 3506.4,3234.02 3558.98,3286.6 ; v2(3301.77,3322.08) 3321.02,3341.33 3477.97,3341.33 3495.27,3358.63 3501.16,3358.63 3511.75,3369.22 3558.98,3369.22 ; C13.2@3400.2,3068.36 3425.01,3068.36 3439.57,3082.92 3439.57,3088.8 3454.12,3103.36 3457.29,3103.36 3463.17,3109.23 3489.31,3109.23 3510.87,3130.78 3547.13,3130.78 3558.98,3142.63 3558.98,3286.6 ; v2(4220.08,3398.41) 4254.95,3398.41 4257.48,3400.94 4305.56,3400.94 4307.06,3399.44 4328.39,3399.44 4385.98,3457.02 ; v2(4456.99,3288.49) 4439.54,3305.94 4439.54,3429.35 4423.24,3445.65 4397.35,3445.65 4385.98,3457.02 ; 3558.98,3286.6 3558.98,3369.22 ; 3558.98,3369.22 3680.17,3490.42 ; 3680.17,3490.42 3985.7,3795.95 3985.7,3812.9 4237.02,4064.22 v1(4492.98,4064.22) 4524.98,4064.22 4537.72,4051.48 4537.72,3940.22 4456.89,3859.39 4456.89,3748.14 4385.98,3677.22 4385.98,3457.02
VTT0V75: C16.2 C17.2 C18.2 C19.2 C20.2 C21.2 C22.2 C23.2 C24.2 C29.2 C30.2 C31.2 C32.2 C39.2 C42.2 C43.2 C44.2 C45.2 C49.2 C171.2 C172.2 C173.2 C174.2 C175.2 C176.2 C181.2 C182.2 C183.2 R1.2 R2.2 R3.2 R4.2 R5.2 R6.2 R7.2 R8.2 R9.2 R10.2 R11.2 R12.2 R13.2 R14.2 R15.2 R16.2 R17.2 R19.2 R20.2 R21.2 R22.2 R23.2 R24.2 U3.3 U3.5 | length 139.3
  Top w4: C175.2@4716.31,2997.22 4716.72,2997.63 4716.72,3022.37 v2(4717.13,3022.78)
  Top w7.46: R20.2@4791.85,3476.88 R20.2@4792.23,3477.26 ; R12.2@4792.1,3126.91 R12.2@4792.48,3127.29 ; R3.2@4792.1,3176.91 R3.2@4792.48,3177.29 ; R2.2@4792.1,3226.91 R2.2@4792.48,3227.29 ; R5.2@4792.1,3276.91 R5.2@4792.48,3277.29 ; R13.2@4792.1,3326.91 R13.2@4792.48,3327.29 ; R16.2@4792.1,3376.91 R16.2@4792.48,3377.29 ; R15.2@4792.1,3426.91 R15.2@4792.48,3427.29 ; R22.2@4792.1,3526.91 R22.2@4792.48,3527.29 ; R21.2@4792.1,3576.91 R21.2@4792.48,3577.29
  Bottom w9: C30.2@4490.98,3771.22 4490.98,3704.22 v7(4519.98,3675.22)
  other v1: 4774.98,3052.55 4844.98,3075.96 4774.98,3102.82 4844.79,3127.36 4774.98,3152.51 4845.48,3177.55 4774.98,3202.95 4844.6,3227.17 4774.98,3252.55 4844.6,3277.17 4774.98,3302.55 4844.6,3327.17 4774.98,3352.55 4844.98,3377.55 4774.98,3402.55 4844.6,3427.17 4774.98,3452.55 4844.98,3477.55 4774.98,3501.77 4844.79,3527.36 4774.98,3552.22 4844.6,3577.17 4774.98,3604.48
  other v2: 4907.42,3014.37 4757.13,3022.78 4797.13,3022.78 4837.13,3022.78 4877.13,3022.78 4907.42,3054.37 4907.42,3094.37 4907.42,3134.37 4907.42,3174.37 4906.92,3214.37 4906.92,3254.37 4906.92,3294.37 4906.92,3334.37 4906.92,3374.37 4906.92,3414.37 4906.92,3454.37 4906.92,3494.37 4906.92,3534.37 4906.92,3574.37 4882.83,3592.16
pads on no net: D1.2 FID1.1 FID1.2 FID2.1 FID2.2 FID3.1 FID3.2 J1.4 J2.0 J2.11 J2.12 J8.0 M1.2 M1.3 M1.4 T1.4 T1.5 T1.12 T1.13 U1.A2 U1.A3 U1.A4 U1.A5 U1.A6 U1.A7 U1.A12 U1.A13 U1.A15 U1.A16 U1.A18 U1.A19 U1.A20 U1.A21 U1.A22 U1.A23 U1.A25 U1.AA3 U1.AA4 U1.AA5 U1.AA7 U1.AA8 U1.AA12 U1.AA13 U1.AA14 U1.AA15 U1.AA22 U1.AA23 U1.AA24 U1.AA25 U1.AA26 U1.AB4 U1.AB5 U1.AB6 U1.AB7 U1.AB8 U1.AB9 U1.AB13 U1.AB15 U1.AB17 U1.AB21 U1.AB22 U1.AB24 U1.AB26 U1.AC3 U1.AC4 U1.AC5 U1.AC7 U1.AC12 U1.AC13 U1.AC14 U1.AC15 U1.AC16 U1.AC17 U1.AC22 U1.AC23 U1.AC24 U1.AC25 U1.AC26 U1.AD4 U1.AD5 U1.AD6 U1.AD10 U1.AD12 U1.AD13 U1.AD15 U1.AD17 U1.AD24 U1.AD26 U1.AE3 U1.AE5 U1.AE7 U1.AE9 U1.AE11 U1.AE15 U1.AE21 U1.AE23 U1.AE24 U1.AE25 U1.AE26 U1.AF2 U1.AF5 U1.AF6 U1.AF7 U1.AF9 U1.AF10 U1.AF11 U1.AF12 U1.AF15 U1.AF16 U1.AF20 U1.AF24 U1.AF25 U1.B1 U1.B2 U1.B4 U1.B6 U1.B12 U1.B16 U1.B18 U1.B20 U1.B22 U1.B23 U1.B24 U1.B25 U1.B26 U1.C1 U1.C2 U1.C3 U1.C4 U1.C5 U1.C6 U1.C7 U1.C12 U1.C13 U1.C14 U1.C15 U1.C19 U1.C21 U1.C24 U1.C25 U1.C26 U1.D1 U1.D3 U1.D5 U1.D6 U1.D12 U1.D13 U1.D14 U1.D22 U1.D23 U1.D24 U1.D26 U1.E1 U1.E2 U1.E3 U1.E4 U1.E5 U1.E6 U1.E12 U1.E23 U1.E24 U1.E25 U1.E26 U1.F1 U1.F3 U1.F5 U1.F7 U1.F8 U1.F12 U1.F13 U1.F14 U1.F22 U1.F24 U1.F26 U1.G3 U1.G4 U1.G5 U1.G6 U1.G7 U1.G8 U1.G9 U1.G11 U1.G13 U1.G19 U1.G20 U1.G21 U1.G22 U1.G23 U1.G24 U1.G25 U1.G26 U1.H5 U1.H6 U1.H7 U1.H8 U1.H9 U1.H10 U1.H12 U1.H13 U1.H17 U1.H18 U1.H19 U1.H20 U1.H21 U1.H22 U1.H24 U1.H26 U1.J3 U1.J4 U1.J5 U1.J7 U1.J10 U1.J11 U1.J12 U1.J13 U1.J16 U1.J17 U1.J20 U1.J22 U1.J23 U1.J24 U1.J25 U1.J26 U1.K1 U1.K3 U1.K5 U1.K6 U1.K7 U1.K9 U1.K10 U1.K12 U1.K14 U1.K15 U1.K18 U1.K19 U1.K20 U1.K21 U1.K22 U1.K24 U1.K26 U1.L7 U1.L9 U1.L17 U1.L18 U1.L19 U1.L20 U1.L21 U1.L23 U1.L24 U1.L25 U1.L26 U1.M4 U1.M18 U1.M19 U1.M21 U1.M23 U1.M24 U1.M26 U1.N17 U1.N18 U1.N19 U1.N20 U1.N21 U1.N22 U1.N23 U1.N24 U1.N25 U1.N26 U1.P20 U1.P21 U1.P22 U1.P24 U1.P26 U1.R5 U1.R7 U1.R10 U1.R23 U1.R24 U1.R25 U1.R26 U1.T4 U1.T6 U1.T8 U1.T9 U1.T10 U1.T18 U1.T19 U1.T20 U1.T23 U1.T24 U1.T26 U1.U3 U1.U4 U1.U5 U1.U7 U1.U8 U1.U9 U1.U17 U1.U19 U1.U20 U1.U21 U1.U22 U1.U23 U1.U24 U1.U25 U1.U26 U1.V5 U1.V7 U1.V8 U1.V10 U1.V11 U1.V12 U1.V15 U1.V17 U1.V18 U1.V19 U1.V20 U1.V22 U1.V23 U1.V24 U1.V26 U1.W5 U1.W7 U1.W8 U1.W9 U1.W10 U1.W12 U1.W16 U1.W18 U1.W19 U1.W22 U1.W24 U1.W25 U1.W26 U1.Y5 U1.Y6 U1.Y8 U1.Y9 U1.Y14 U1.Y15 U1.Y20 U1.Y21 U1.Y22 U1.Y24 U1.Y26 U2.J1 U2.J9 U2.L1 U2.L9 U2.M7 U2.T7 U4.9 U5.8 U5.10 U6.3 U6.6 U8.22 U9.PAD U12.6 U12.7 U12.9 U12.10 U12.13 U12.31 U12.33 U12.40 U12.41 U12.49 U12.50 U12.51 U12.52 U12.53 U12.54 U12.55 U12.56 U12.57 U12.58 U12.59 U12.60 U12.61 U12.62 U12.63 U12.64 U14.7 U15.8 U15.10 U16.9 U16.11 U17.8 U17.10 U18.2 U18.3 U18.6 U18.7 U18.21 U18.22 U18.23 U18.24 U18.25 U18.28 U18.31 U18.35 U18.38 U18.41 U19.3 U19.7 U20.2 U20.4 U20.5 U20.6 U20.8 U20.9 U20.10 U20.11 U20.12 U20.17 U20.18 U20.19 U21.9 U23.1 U24.1 U25.4 U25.5 U25.6 U25.8 U25.9 U25.10 U25.11 U25.12 U25.14 Y2.1
copper on no net:
  other v3: 4698.47,1633.13 4741.78,1633.13 4698.47,1676.43 4741.78,1676.43 4329.89,2735.27 4369.26,2735.27 4408.63,2735.27 4448,2735.27 4487.37,2735.27 4329.89,2774.64 4369.26,2774.64 4408.63,2774.64 4448,2774.64 4487.37,2774.64 4329.89,2814.01 4369.26,2814.01 4408.63,2814.01 4448,2814.01 4487.37,2814.01 4329.89,2853.38 4369.26,2853.38 4408.63,2853.38 4448,2853.38 4487.37,2853.38 4329.89,2892.75 4369.26,2892.75 4408.63,2892.75 4448,2892.75 4487.37,2892.75

## Polygon pours and split planes (outlines as drawn)
5V on Top "5V_L01_P076" (solid, remove dead copper, pour order 76): 3803.99,2621.94 3810.56,2615.37 3880,2615.37 3880,2574.86 3766.17,2574.86 3579.82,2574.86 3579.82,2632.47 3630.76,2683.41 3824.76,2683.41 3828.76,2679.41 3880,2679.41 3880,2637.41 3803.76,2637.41
GND on Top "GND_L01_P020" (solid, remove dead copper, pour order 20): 71 vertices, not listed, extent 2328.98,2833.22 5210.49,4358.78
GND on Top "GND_L01_P005" (solid, remove dead copper, pour order 5): 33 vertices, not listed, extent 1499.17,2913.81 2562.13,4285.78
5V on Top "5V_L01_P021" (solid, remove dead copper, pour order 21): 26 vertices, not listed, extent 2230.98,4019.22 4130.48,4602.22
+24V on Top "+24V_L01_P000" (solid, remove dead copper, pour order 0): 2869.99,2411.94 2869.99,2448 2989.46,2448 2990.13,2447.33 2990.13,2593.34 2749.86,2593.34 2749.86,2411.94
5V on Top "5V_L01_P006" (solid, remove dead copper, pour order 6): 1975.22,4484.78 2144.27,4315.74 2349.48,4315.74 2349.48,4031.32 2359.57,4021.22 2357.57,4019.22 2246.58,4019.22 1934.85,4330.95 1729.21,4330.95 1664.42,4395.74 1499.17,4395.74 1502.13,4398.69 1502.13,4484.78
NetD15_1 on Top "NETD15_1_L01_P054" (solid, remove dead copper, pour order 54): 1426.63,2846.78 1422.13,2846.78 1270.13,2847.78 1085.13,2662.78 1085.13,2244.78 1089.13,2240.78 1614.13,2240.78 1614.13,2659.28
5V_AMP on Top "5V_AMP_L01_P035" (solid, remove dead copper, pour order 35): 3390.13,1790.21 3389.13,1786.77 3454.13,1721.78 3454.13,1668.78 3582.13,1668.78 3602.13,1648.78 3602.13,1613.78 3423.13,1613.78 3382.13,1654.78 3209.13,1654.78 3208.13,1655.78 3208.13,1762.78 3238.13,1762.78 3238.13,1790.75
GND_ETH on Top "GND_ETH_L01_P010" (solid, remove dead copper, pour order 10): 2453.57,1751.27 2453.57,2647.18 1722.57,2647.18 1722.57,1755.05
GND on Top "GND_L01_P002" (solid, remove dead copper, pour order 2): 25 vertices, not listed, extent 3017.13,1716.14 3438.13,2569.94
GND on Top "GND_L01_P001" (solid, remove dead copper, pour order 1): 21 vertices, not listed, extent 854.13,3709.78 4040.13,4750.78
+24V on Top "+24V_L01_P004" (solid, remove dead copper, pour order 4): 1492.13,3575.74 1492.13,4035.74 1672.13,4035.74 1682.13,4025.74 1682.13,3575.74
VTT0V75 on Top "VTT0V75_L01_P011" (solid, remove dead copper, pour order 11): 4944.98,2997.22 4967.98,2974.22 4967.98,2952.22 4954.98,2939.22 4909.98,2939.22 4894.98,2954.22 4894.98,2978.22 4892.65,2978.22 4883.65,2987.22 4702.17,2987.22 4705.15,3627.22 4944.98,3627.22
VCC1V5 on Top "VCC1V5_L01_P012" (solid, remove dead copper, pour order 12): 19 vertices, not listed, extent 4119.98,3605.22 4434.98,3900.22
NetC26_2 on Top "NETC26_2_L01_P013" (solid, remove dead copper, pour order 13): 4316.98,3925.46 4316.98,3869.22 4341.98,3844.22 4341.98,3824.22 4344.98,3821.22 4401.98,3821.22 4401.98,3864.67 4411.98,3874.67 4411.98,3896.22 4381.21,3896.22 4351.98,3925.46
VTT0V75 on Top "VTT0V75_L01_P014" (solid, remove dead copper, pour order 14): 4587.29,3543.28 4696.16,3434.41 4696.16,2993.24 4706.67,2982.72 4888.15,2982.72 4888.15,3514.05 4764.48,3637.72 4580.98,3637.72 4519.98,3698.72 4519.98,3886.22 4507.98,3898.22 4440.98,3898.22 4440.98,3689.59 4568.57,3562
GND on Top "GND_L01_P015" (solid, remove dead copper, pour order 15): 4195.98,3717.22 4291.98,3813.22 4291.98,4061.22 4175.98,4061.22 4162.98,4047.22 4162.98,3793.22 4160.98,3791.22 4053.98,3791.22 4053.98,3716.22 4054.98,3717.22
VDD_3V3 on Top "VDD_3V3_L01_P016" (solid, remove dead copper, pour order 16): 22 vertices, not listed, extent 3896.98,3797.22 4413.48,4201.22
VREF0V75 on Top "VREF0V75_L01_P018" (solid, remove dead copper, pour order 18): 4479.98,3983.22 4479.98,4075.22 4509.98,4075.22 4509.98,3988.22 4504.98,3983.22
1V2 on Top "1V2_L01_P022" (solid, remove dead copper, pour order 22): 2925.22,3955.5 2888.98,3919.26 2888.98,3711.22 3364.98,3711.22 3364.98,3955.5 3157.26,3955.5
GND on Top "GND_L01_P023" (solid, remove dead copper, pour order 23): 19 vertices, not listed, extent 1530.13,1191.25 3236.31,3021.09
+24V on Top "+24V_L01_P028" (solid, remove dead copper, pour order 28): 30 vertices, not listed, extent 738,2933.78 1682.13,4035.74
GND on Top "GND_L01_P029" (solid, remove dead copper, pour order 29): 24 vertices, not listed, extent 3182.31,1189.25 4202.72,1516.13
GND on Top "GND_L01_P031" (solid, remove dead copper, pour order 31): 4139.13,1520.78 4139.13,1216.78 4155.13,1200.78 5335.13,1200.78 5343.13,1208.78 5341.13,1210.78 5341.13,1511.78 5049.13,1511.78 5044.13,1506.78 5044.13,1324.78 4464.13,1324.78 4433.13,1355.78 4433.13,1517.78
ANA_3V3 on Top "ANA_3V3_L01_P032" (solid, remove dead copper, pour order 32): 4906.13,2167.78 4915.13,2176.78 4966.39,2176.78 4966.39,2142.03 4974.88,2133.54 5058.39,2133.54 5058.39,2087.8 5049.38,2078.78 4924.27,2078.78 4885.13,2103.78 4872.72,2111.6 4872.72,2166.37
6V on Top "6V_L01_P038" (solid, remove dead copper, pour order 38): 2988.63,1789.41 2988.63,2185.69 2831.72,2185.69 2805.13,2159.1 2805.13,1760.78 2883.13,1684.67 3125.01,1684.67 3125.01,1760.6 3094.13,1760.6 3094.13,1789.41
-5V_AMP on Top "-5V_AMP_L01_P039" (solid, remove dead copper, pour order 39): 4189.26,1719.04 4166,1695.78 4165.88,1695.78 4165.88,1641.92 4163.5,1639.54 4137.74,1613.78 3808.27,1613.78 3808.27,1759.97 3852.74,1804.43 4085.91,1804.43 4087.9,1806.43 4159.39,1806.43 4159.39,1785.77 4172.38,1772.78 4189.26,1772.78
-8V on Top "-8V_L01_P040" (solid, remove dead copper, pour order 40): 31 vertices, not listed, extent 4013.31,1890.78 4453.04,2579.78
+24V on Top "+24V_L01_P041" (solid, pour order 41): 4105.84,2286.5 4021.39,2286.5 4005.22,2270.34 3962.49,2227.61 3918.21,2227.61 3854.03,2163.43 3854.03,2087.29 3917.63,2087.29 3974.12,2143.78 4038.13,2143.78 4038.13,2227.61 4068.77,2258.25 4105.84,2258.25
ANA_3V3 on Top "ANA_3V3_L01_P044" (solid, remove dead copper, pour order 44): 3962.49,2671.84 3962.49,2637.41 4158.71,2637.41 4177.63,2656.33 4177.63,2751.6 4052.95,2751.6 4004.76,2703.41 4004.76,2673.41 4003.76,2672.41
GND on Top "GND_L01_P053" (solid, remove dead copper, pour order 53): 5752.13,1894.78 5735.86,1894.78 5662.56,1968.08 5279.43,1968.08 5249.13,1937.78 5221.13,1937.78 5221.13,2000.78 5185.13,2036.78 5185.13,2096.93 5220.62,2096.93 5263.47,2139.78 5890.61,2139.78 5926.65,2103.74 5881.13,2058.21 5881.13,1895.78
5V on Bottom "5V_L16_P045" (solid, remove dead copper, pour order 45): 3803.99,2621.94 3810.56,2615.37 3852.74,2615.37 3852.74,2574.86 3766.17,2574.86 3579.82,2574.86 3579.82,2632.47 3630.76,2683.41 3824.76,2683.41 3828.76,2679.41 3845.76,2679.41 3845.76,2637.41 3803.76,2637.41
NetD14_1 on Bottom "NETD14_1_L16_P063" (solid, remove dead copper, pour order 63): 740.58,2124 740.58,1905 847.58,1905 847.58,2124
NetD13_1 on Bottom "NETD13_1_L16_P062" (solid, remove dead copper, pour order 62): 541,2124 541,1905 649,1905 649,2124
NetD12_1 on Bottom "NETD12_1_L16_P061" (solid, remove dead copper, pour order 61): 348.31,2123 348.31,1904 455.31,1904 455.31,2123
NetD11_1 on Bottom "NETD11_1_L16_P060" (solid, remove dead copper, pour order 60): 145,2122 145,1903 252,1903 252,2122
GND on Bottom "GND_L16_P025" (solid, remove dead copper, pour order 25): 24 vertices, not listed, extent 58,2222 1730.07,3651
6V on Bottom "6V_L16_P003" (solid, remove dead copper, pour order 3): 20 vertices, not listed, extent 2752.13,1684.67 3125.01,2232.31
NetD15_1 on Bottom "NETD15_1_L16_P024" (solid, remove dead copper, pour order 24): 899.13,2374.78 901.72,2377.38 1615.13,2377.38 1615.13,2233.78 1613.13,2231.78 1603.13,2241.78 898.13,2241.78
GND on Bottom "GND_L16_P030" (solid, remove dead copper, pour order 30): 3494.31,1579.25 3492.31,1577.25 3492.31,1440.45 3565.51,1367.25 3707,1367.25 3793.31,1453.56 3793.31,1709.25 3654.57,1709.25 3609.31,1664 3609.31,1581.25
GND on Bottom "GND_L16_P033" (solid, remove dead copper, pour order 33): 22 vertices, not listed, extent 2871.13,1683.78 3436.43,2568.78
6V on Bottom "6V_L16_P036" (solid, pour order 36): 3076.13,1783.78 3075.13,1782.78 3075.13,1685.78 2882.13,1685.78 2882.13,1783.33
+24V on Bottom "+24V_L16_P037" (solid, pour order 37): 2994.01,2491.94 2989.01,2496.94 2989.01,2592.94 2749.13,2592.94 2749.13,2457.94 2860.01,2457.94 2862.01,2455.94 2876.01,2469.94 2876.01,2476.94 2976.01,2476.94 2991.01,2491.94
CLK_1V8 on Bottom "CLK_1V8_L16_P046" (solid, remove dead copper, pour order 46): 4988.13,2624.78 4862.13,2750.78 4628.13,2750.78 4611.13,2733.78 4630.63,2714.28 4630.63,2455.78 4765.93,2455.78 4890.13,2331.09 4890.13,2214.86 4891.13,2213.86 5046.2,2213.86 5118.15,2285.8 5118.15,2495.66
GND on Bottom "GND_L16_P048" (solid, remove dead copper, pour order 48): 23 vertices, not listed, extent 4800.74,1755.78 5657.13,2814.78
5V on Bottom "5V_L16_P049" (solid, remove dead copper, pour order 49): 5423.63,2462.44 5423.63,2610.55 5556.41,2610.55 5556.41,2455.78 5562.22,2455.78 5569.19,2449.71 5638.13,2380.78 5638.13,2238.57 5419.34,2238.57 5334.13,2323.78 5334.13,2374.39 5335.58,2374.39
5V on Bottom "5V_L16_P050" (solid, remove dead copper, pour order 50): 5206.13,1752.78 5119.13,1752.78 5109.13,1742.78 5109.13,1664.78 5526.1,1664.78 5526.1,1760.31 5409.63,1876.78 5330.13,1876.78
GND on Bottom "GND_L16_P051" (solid, remove dead copper, pour order 51): 5132.13,1602.78 5085.13,1555.78 5085.13,1454.78 5311.63,1454.78 5311.63,1602.78
NetD14_1 on Signal Layer 1 "NETD14_1_L03_P075" (solid, remove dead copper, pour order 75): 790.82,3351.67 856.25,3286.25 750,3180 750,2427.5 846,2331.5 846,1904.5 741,1904.5 741,2299 673.43,2366.57 673.43,3234.28
NetD13_1 on Signal Layer 1 "NETD13_1_L03_P074" (solid, remove dead copper, pour order 74): 453.1,3307.5 550,3307.5 550,2363 649,2264 649,1904 535,1904 534,1905 534,2261 453.1,2341.9
NetD12_1 on Signal Layer 1 "NETD12_1_L03_P073" (solid, remove dead copper, pour order 73): 18 vertices, not listed, extent 291,1904 840,3490
NetD11_1 on Signal Layer 1 "NETD11_1_L03_P072" (solid, remove dead copper, pour order 72): 501.2,3510.92 501.2,3463 392,3463 249,3320 249,1904 149,1904 149,1924 149,3354 307,3512 405,3512
+24V on Signal Layer 1 "+24V_L03_P058" (solid, remove dead copper, pour order 58): 24 vertices, not listed, extent 738,2933.78 1578.54,3670.48
NetD15_1 on Signal Layer 1 "NETD15_1_L03_P026" (solid, remove dead copper, pour order 26): 1426.63,2809.28 1426.63,2846.78 1422.13,2846.78 1270.13,2847.78 1270.13,2808.78 1085.13,2623.78 1085.13,2244.78 1089.13,2240.78 1614.13,2240.78 1614.13,2623.72 1612.19,2623.72
NetD14_1 on Signal Layer 2 "NETD14_1_L05_P067" (solid, remove dead copper, pour order 67): 812.75,3329.75 856.25,3286.25 750,3180 750,2427.5 846,2331.5 846,1904.5 741,1904.5 741,2299 673.43,2366.57 673.43,3190.43
NetD11_1 on Signal Layer 2 "NETD11_1_L05_P064" (solid, remove dead copper, pour order 64): 501.2,3510.92 501.2,3463 392,3463 249,3320 249,1904 149,1904 149,1924 149,3354 307,3512 405,3512
NetD12_1 on Signal Layer 2 "NETD12_1_L05_P065" (solid, remove dead copper, pour order 65): 18 vertices, not listed, extent 291,1904 840,3490
NetD13_1 on Signal Layer 2 "NETD13_1_L05_P066" (solid, remove dead copper, pour order 66): 453.1,3307.5 550,3307.5 550,2363 649,2264 649,1904 535,1904 534,1905 534,2261 453.1,2341.9
+24V on Signal Layer 2 "+24V_L05_P059" (solid, remove dead copper, pour order 59): 24 vertices, not listed, extent 739.33,2934.55 1579.87,3671.25
NetD15_1 on Signal Layer 2 "NETD15_1_L05_P055" (solid, remove dead copper, pour order 55): 1426.63,2809.28 1426.63,2846.78 1422.13,2846.78 1270.13,2847.78 1270.13,2808.78 1085.13,2623.78 1085.13,2244.78 1089.13,2240.78 1614.13,2240.78 1614.13,2623.72 1612.19,2623.72
NetD14_1 on Signal Layer 3 "NETD14_1_L12_P071" (solid, remove dead copper, pour order 71): 796.32,3346.17 856.25,3286.25 750,3180 750,2427.5 846,2331.5 846,1904.5 741,1904.5 741,2299 673.43,2366.57 673.43,3223.28
NetD13_1 on Signal Layer 3 "NETD13_1_L12_P070" (solid, remove dead copper, pour order 70): 453.1,3307.5 550,3307.5 550,2363 649,2264 649,1904 535,1904 534,1905 534,2261 453.1,2341.9
NetD12_1 on Signal Layer 3 "NETD12_1_L12_P069" (solid, remove dead copper, pour order 69): 18 vertices, not listed, extent 291,1904 840,3490
NetD11_1 on Signal Layer 3 "NETD11_1_L12_P068" (solid, remove dead copper, pour order 68): 501.2,3510.92 501.2,3463 392,3463 249,3320 249,1904 149,1904 149,1924 149,3354 307,3512 405,3512
NetD15_1 on Signal Layer 3 "NETD15_1_L12_P056" (solid, remove dead copper, pour order 56): 1426.63,2809.28 1426.63,2846.78 1422.13,2846.78 1270.13,2847.78 1270.13,2808.78 1085.13,2623.78 1085.13,2244.78 1089.13,2240.78 1614.13,2240.78 1614.13,2623.72 1612.19,2623.72
NetD15_1 on Signal Layer 4 "NETD15_1_L14_P057" (solid, remove dead copper, pour order 57): 1426.63,2809.28 1426.63,2846.78 1422.13,2846.78 1270.13,2847.78 1270.13,2808.78 1085.13,2623.78 1085.13,2244.78 1089.13,2240.78 1614.13,2240.78 1614.13,2623.72 1612.19,2623.72
GND_ETH on Ground Plane 1 (split plane): 2448.05,1766.1 1765.32,1766.1 1728.08,1803.34 1728.08,2633.04 1732.96,2637.92 2448.05,2637.92
GND_USB on Ground Plane 1 (split plane): 5866.93,1770.76 5866.93,1335.35 5785.68,1254.1 5449,1254.1 5445.08,1253.71 5441.31,1252.57 5437.83,1250.71 5434.79,1248.21 5433.07,1246.49 5433.07,1604.76 5663.24,1834.93 5802.76,1834.93
GND on Ground Plane 1 (split plane): 65 vertices, not listed, extent 73.1,1128.1 6185.9,4783.9
GND_ETH on Ground Plane 2 (split plane): 2446.41,1766.1 1765.32,1766.1 1728.08,1803.34 1728.08,2632.98 1733.02,2637.92 2446.41,2637.92
GND_USB on Ground Plane 2 (split plane): 5866.93,1770.76 5866.93,1335.35 5785.68,1254.1 5449,1254.1 5445.08,1253.71 5441.31,1252.57 5437.83,1250.71 5434.79,1248.21 5433.07,1246.49 5433.07,1604.76 5663.24,1834.93 5802.76,1834.93
GND on Ground Plane 2 (split plane): 70 vertices, not listed, extent 73.1,1128.1 6185.9,4783.9
GND_ETH on Ground Plane 3 (split plane): 2448.05,1766.1 1765.32,1766.1 1728.08,1803.34 1728.08,2633.04 1732.96,2637.92 2448.05,2637.92
GND_USB on Ground Plane 3 (split plane): 5866.93,1770.76 5866.93,1335.35 5785.68,1254.1 5449,1254.1 5445.08,1253.71 5441.31,1252.57 5437.83,1250.71 5434.79,1248.21 5433.07,1246.49 5433.07,1604.76 5663.24,1834.93 5802.76,1834.93
GND on Ground Plane 3 (split plane): 65 vertices, not listed, extent 73.1,1128.1 6185.9,4783.9
VTT0V75 on Power Plane (split plane): 28 vertices, not listed, extent 4442.07,2925.32 4980.88,3893.48
VCC1V5 on Power Plane (split plane): 4404.48,3801.69 4404.48,3693.69 4404.86,3691.73 4405.97,3690.08 4514.88,3581.17 4514.88,3062.67 4509.59,3057.39 4265.02,3057.39 4201.07,3121.33 4201.07,3698.11 4303.16,3800.2 4304.27,3801.85 4304.66,3803.8 4304.66,3806.12 4400.04,3806.12
5V_AMP on Power Plane (split plane): 20 vertices, not listed, extent 3198.22,1495.88 4855.03,1783.99
VDD_3V3 on Power Plane (split plane): 101 vertices, not listed, extent 262.1,1828.43 5580.5,4565.9
+24V on Power Plane (split plane): 51 vertices, not listed, extent 1187.2,1932.85 4155.05,3665.71
5V on Power Plane (split plane): 26 vertices, not listed, extent 73.1,1128.1 6185.9,4783.9
GND_ETH on Ground Plane 4 (split plane): 2448.05,1766.1 1765.32,1766.1 1728.08,1803.34 1728.08,2633.04 1732.96,2637.92 2448.05,2637.92
GND_USB on Ground Plane 4 (split plane): 5866.93,1770.76 5866.93,1335.35 5785.68,1254.1 5449,1254.1 5445.08,1253.71 5441.31,1252.57 5437.83,1250.71 5434.79,1248.21 5433.07,1246.49 5433.07,1604.76 5663.24,1834.93 5802.76,1834.93
GND on Ground Plane 4 (split plane): 65 vertices, not listed, extent 73.1,1128.1 6185.9,4783.9
GND_ETH on Ground Plane 5 (split plane): 2448.05,2636.15 2448.05,1766.1 1765.32,1766.1 1728.08,1803.34 1728.08,2633.04 1731.26,2636.22 2447.98,2636.22
GND_USB on Ground Plane 5 (split plane): 5866.93,1770.76 5866.93,1335.35 5785.68,1254.1 5449,1254.1 5445.08,1253.71 5441.31,1252.57 5437.83,1250.71 5434.79,1248.21 5433.07,1246.49 5433.07,1604.76 5433.55,1605.23 5591.39,1763.07 5663.24,1834.93 5802.76,1834.93
GND on Ground Plane 5 (split plane): 65 vertices, not listed, extent 73.1,1128.1 6185.9,4783.9
CLK_1V8 on Power Plane 2 (split plane): 28 vertices, not listed, extent 3245.07,2218.96 5131.03,3123.68
ANA_3V3 on Power Plane 2 (split plane): 28 vertices, not listed, extent 3424.98,2070.88 5105.03,2745.68
-5V_AMP on Power Plane 2 (split plane): 4855.03,1740.67 4855.03,1495.89 4855.01,1495.88 4689.24,1495.88 4569.73,1615.38 4568.08,1616.49 4566.13,1616.88 3586.92,1616.88 3586.92,1717.85 3586.92,1813.68 4782.01,1813.68
VCC1V5 on Power Plane 2 (split plane): 25 vertices, not listed, extent 3149.39,3008.48 4511.88,3912.48
1V2 on Power Plane 2 (split plane): 37 vertices, not listed, extent 2449.22,2776 3346.88,3897.12